# Altium PCB radio-module.PcbDoc
Units mm, origin at the board's own origin, x right, y up, seen from the top; angles counter-clockwise.
Board outline 50.67 x 34.29 mm, 2 copper layers (Top Layer, Bottom Layer); 44 components, 34 nets, 131 pads, 208 vias.
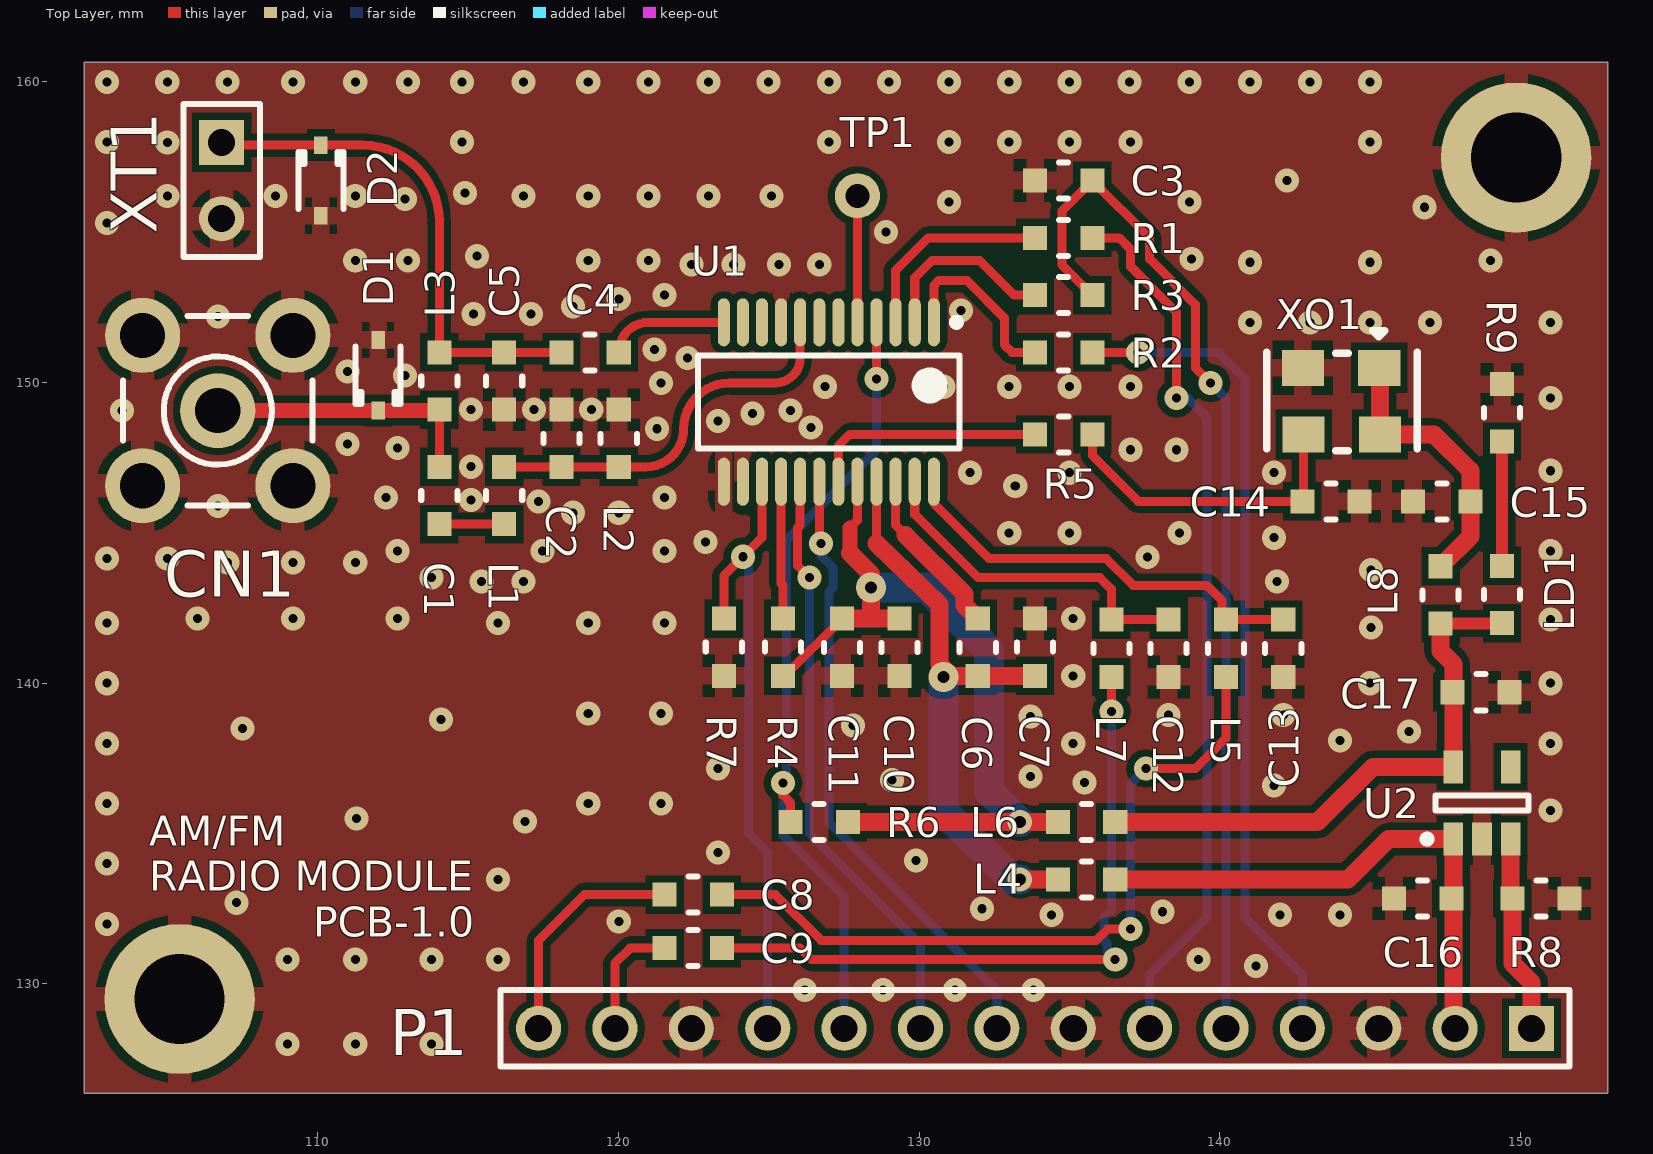
[diagram p0: Top Layer view]
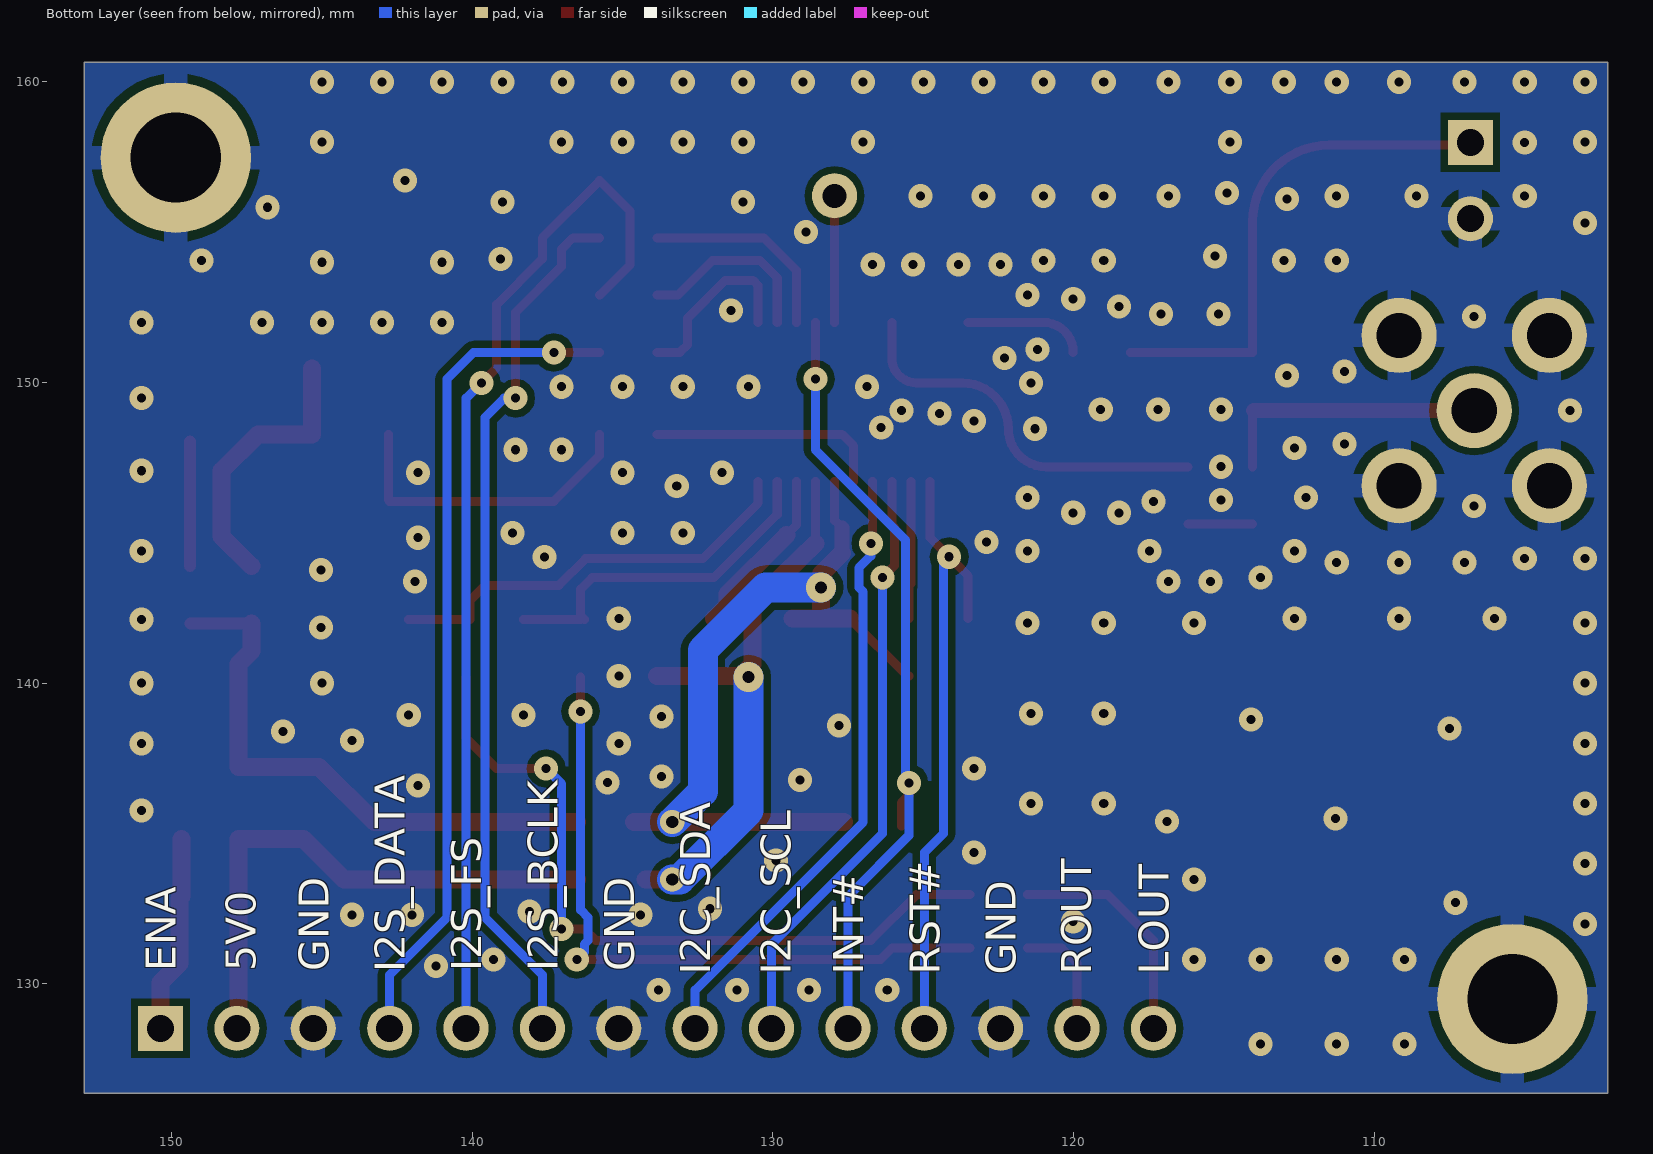
[diagram p1: Bottom Layer view, seen from below]
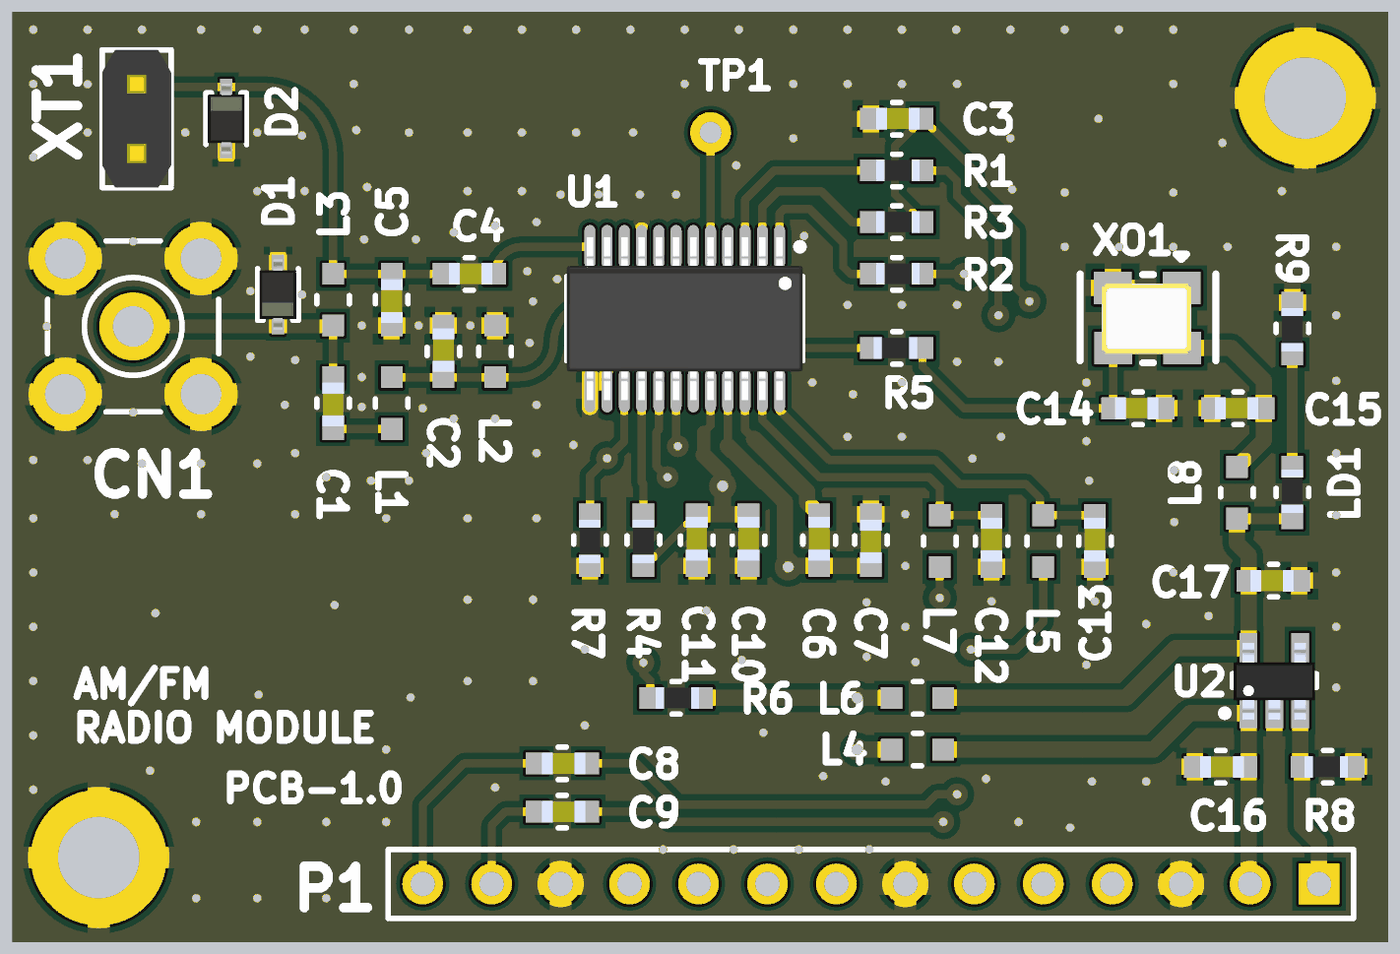
[diagram p2: 3D render of the assembled board from above, using the file's embedded part models]

## Layer stack, top to bottom
Top Solder: solder mask 0.0102, Solder Resist, Dk 3.5
Top Layer: signal copper 0.0356
Dielectric 1: dielectric 0.32, FR-4, Dk 4.8
Bottom Layer: signal copper 0.0356
Bottom Solder: solder mask 0.0102, Solder Resist, Dk 3.5

## Board outline
102.235,126.365 152.908,126.365 152.908,160.655 102.235,160.655

## Design rules (kind name [scope] priority, off if disabled: settings)
Clearance [All] p1: gap=0.23 ignorepadtopadclearanceinfootprint=FALSE
PolygonConnect [All] p1: thpad.connectstyle=Relief thpad.reliefconductorwidth=0.8 thpad.reliefentries=4 thpad.polygonreliefangle="90 Angle" thpad.airgapwidth=0.3 smdpad.connectstyle=Relief smdpad.reliefconductorwidth=0.6 smdpad.reliefentries=4 smdpad.polygonreliefangle="90 Angle" smdpad.airgapwidth=0.3 via.connectstyle=Direct via.reliefconductorwidth=0.254 via.reliefentries=4 via.polygonreliefangle="90 Angle" via.airgapwidth=0.254
RoomDefinition radio-module [InComponentClass('radio-module')] p1 off: confinementstyle=ConfineIn formatcopy=TRUE lockcomponents=FALSE outline 154.051,126.492 168.275,126.492 168.275,131.445 154.051,131.445
RoutingVias [All] p1: holewidth=0.3 width=0.8 viastyle="Through Hole" minholewidth=0.3 minwidth=0.8 maxholewidth=0.4 maxwidth=1
SolderMaskExpansion [All] p1: expansion=0.102
Width [All] p1: maxlimit=1 minlimit=0.3 preferedwidth=0.3
30 further rules are at their usual default settings.

## Components (designator, comment, footprint, x,y, rotation, side; value= is the part's Value field where it differs from the comment)
C1 "06035A330JAT2A" C0603 114.046,147.193 r270 top value=33pF
C2 "GCM1885C2A2R7BA16D" C0603 118.11,147.193 r90 top value=2.7pF
C3 "8.2pF" C0603 133.858,156.718 r0 top
C4 "0.47uF" C0603 118.11,151.003 r0 top
C5 "GCM1885C2A2R7BA16D" C0603 116.205,151.003 r270 top value=2.7pF
C6 "0.22uF" C0603 131.953,140.243 r90 top
C7 "1uF" C0603 133.858,142.148 r270 top
C8 "0.1uF" C0603 121.539,132.969 r0 top value=DNI
C9 "0.1uF" C0603 121.539,131.191 r0 top value=DNI
C10 "0.1uF" C0603 129.35,140.243 r90 top
C11 "1uF" C0603 127.444,140.243 r90 top
C12 "8.2pF" C0603 138.303,140.208 r90 top value=DNI
C13 "8.2pF" C0603 142.113,140.208 r90 top value=DNI
C14 "30pF" C0603 144.653,146.05 r180 top
C15 "CC0603KRX7R9BB104" C0603 148.336,146.05 r180 top value=0.1uF
C16 "10uF" C0603 145.796,132.842 r0 top
C17 "10uF" C0603 149.641,139.7 r180 top
CN1 "SMB" SMB_V-RJ45 106.68,149.066 r0 top locked
D1 "CDSOD323-T05LC" SOD-323 112.014,150.241 r270 top value=TVS
D2 "CDSOD323-T05LC" SOD-323 110.109,156.718 r90 top value=TVS
L1 "LQW18AN18NJ0ZD" IND0603 116.205,147.193 r270 top value=18nH
L2 "LQW18ANR12J00D" IND0603 120.015,147.193 r90 top value=120nH
L3 "CIL 10J 4R7" IND0603 114.046,149.098 r90 top value=4.7uH
L4 "BLM18AG102SN1D" IND0603 136.525,133.477 r180 top value=FB
L5 "BLM18AG102SN1D" IND0603 140.208,140.208 r90 top value=DNI
L6 "BLM18AG102SN1D" IND0603 136.525,135.382 r180 top value=FB
L7 "BLM18AG102SN1D" IND0603 136.398,140.208 r90 top value=DNI
L8 "BLM18AG102SN1D" IND0603 147.347,143.891 r270 top value=EMIF
LD1 "LED_G" R0603 149.388,142 r90 top
P1 "HDR 14" PLS-14 150.368,128.524 r180 top locked
R1 "2k" R0603 133.858,154.813 r0 top
R2 "600" R0603 133.858,151.003 r0 top
R3 "2k" R0603 133.858,152.908 r0 top
R4 "10k" R0603 125.476,142.148 r270 top
R5 "22" R0603 135.763,148.273 r180 top
R6 "10k" R0603 125.73,135.382 r0 top
R7 "100k" R0603 123.507,142.148 r270 top
R8 "100k" R0603 151.638,132.842 r180 top
R9 "680" R0603 149.388,149.945 r270 top
TP1 "TEST-POINT" PAD 127.953,156.21 r0 top
U1 "Si473x-GU" SSOP-24 127,149.352 r270 top locked
U2 "TLV75733PDBVR" SOT-23-5 148.722,136.017 r90 top locked
XO1 "CXO-7C 32.768" CXO-5032 144.018,149.352 r180 top value=CXO-7C
XT1 "AM LOOP" PLS-2 106.807,157.988 r270 top

## Footprints (in the part's own frame and the unit in brackets; to place one, negate y for a bottom-side part, rotate by r counter-clockwise, add the part's x,y. Pads: shape width x height; smd on the part's side, far side on the other; paste and mask are expansions set on the pad)
C0603 [mm]
  rect 0.8x0.8 smd: 1(1.905,0) 2(0,0)
  silkscreen extent 0.8,-0.6 1.1,0.6, body extent 0.2,-0.4 1.8,0.4, height 0.9
CXO-5032 [mm] "TXC 7C SMD CMOS CXO Oscillators"
  rect 1.4x1.2 smd: 1(-1.288,-1.134) 2(1.252,-1.134) 3(1.227,1.079) 4(-1.313,1.079)
  silkscreen extent -2.55,-2.37 2.45,1.63, body extent -1.65,-1.3 1.65,1.3, height 0.8
IND0603 [mm]
  rect 0.8x0.8 smd: 1(1.905,0) 2(0,0)
  silkscreen extent 0.8,-0.6 1.1,0.6
PAD [mm]
  round 1.5 hole 0.8: 1(0,0)
PLS-2 [mm] "Connector; Header; 2 Position"
  rect 1.5x1.5 hole 0.9: 1(0,0)
  round 1.5 hole 0.9: 2(2.54,0)
  silkscreen extent -1.27,-1.27 3.81,1.27, body extent -1.27,-1.27 3.81,1.27, height 8.44
PLS-14 [mm] "Connector; Header; 14 Position"
  rect 1.5x1.5 hole 0.9: 1(0,0)
  round 1.5 hole 0.9: 2(2.54,0) 3(5.08,0) 4(7.62,0) 5(10.16,0) 6(12.7,0) 7(15.24,0) 8(17.78,0) 9(20.32,0) 10(22.86,0) 11(25.4,0) 12(27.94,0) 13(30.48,0) 14(33.02,0)
  silkscreen extent -1.27,-1.27 34.29,1.27
R0603 [mm]
  rect 0.8x0.8 smd: 1(1.905,0) 2(0,0)
  silkscreen extent 0.8,-0.6 1.1,0.6, body extent 0.2,-0.4 1.8,0.4, height 0.5
SMB_V-RJ45 [mm] "Connector; SMB Straight"
  round 2.5 hole 1.5: 1(0,0) 2(-2.5,-2.5) 2(-2.5,2.5) 2(2.5,-2.5) 2(2.5,2.5)
  silkscreen extent -3.15,-3.15 3.15,3.15
SOD-323 [mm]
  rect 0.59x0.45 smd: 1(-1.175,0) 2(1.175,0)
  silkscreen extent -0.95,-0.75 0.95,0.75, body extent -1.3,-0.68 1.3,0.67, height 1.1
SOT-23-5 [mm] "SOT23, 5-Leads, Body 2.9x1.6mm, Pitch 0.95mm, Lead Span 2.8mm, IPC Medium Density"
  rect 1.1x0.65 smd: 1(-1.2,0.95) 2(-1.2,0) 3(-1.2,-0.95) 4(1.2,-0.95) 5(1.2,0.95)
  silkscreen extent -1.32,-1.55 0.25,1.95, body extent -1.44,-1.5 1.4,1.5, height 1.1
SSOP-24 [mm] "SSOP, 24-Leads, Body 8,65x3,90mm, Pitch 0,64mm, IPC Medium Density"
  oval 1.6x0.4 smd: 1(-2.65,3.492) 2(-2.65,2.858) 3(-2.65,2.222) 4(-2.65,1.587) 5(-2.65,0.952) 6(-2.65,0.317) 7(-2.65,-0.318) 8(-2.65,-0.953) 9(-2.65,-1.588) 10(-2.65,-2.223) 11(-2.65,-2.858) 12(-2.65,-3.493) 13(2.65,-3.492) 14(2.65,-2.858) 15(2.65,-2.222) 16(2.65,-1.587) 17(2.65,-0.952) 18(2.65,-0.317) 19(2.65,0.318) 20(2.65,0.953) 21(2.65,1.588) 22(2.65,2.223) 23(2.65,2.858) 24(2.65,3.493)
  silkscreen extent -2.77,-4.35 1.55,4.37, body extent -3,-4.35 3,4.35, height 1.75

## Part data
C1 C2 C3 C4 C5 C6 C7 C8 C9 C10 C11 C12 C13 C14 C15 C16 C17: library part CAP_NPOL, "CAP_NPOL"
CN1: "SMB Straight Connector", LatestRevisionDate=17-Jul-2002, LatestRevisionNote="Re-released for DXP Platform.", Publisher="Altium Limited"
D1 D2: library part TVS_BIDIR, "TVS Diodes"
L1 L2 L3 L8: library part IND_WO_IRON, "IND_WO_IRON"
L4 L5 L6 L7: library part IND_W_IRON, "IND_W_IRON"
LD1: library part LED_GREEN, "LED Green"
P1: "Header, 14-Pin", LatestRevisionDate=17-Jul-2002, LatestRevisionNote="Re-released for DXP Platform.", Publisher="Altium Limited"
R1 R2 R3 R4 R5 R6 R7 R8 R9: library part RESISTOR, "RES"
TP1: "PCB terminal block"
U1: "BROADCAST AM/FM/SW/LW RADIO RECEIVER"
U2: library part TLV733P, "Capacitor-Free, 1A, Low-Dropout Regulator with Foldback Current Limit for Portable Devices"
XO1: library part CXO-7C
XT1: library part "HDR 2", "Header, 2-Pin", LatestRevisionDate=17-Jul-2002, LatestRevisionNote="Re-released for DXP Platform.", Publisher="Altium Limited"

## Free pads (board coordinates)
  round 5 hole 3: MH(105.41,129.498) MH(149.86,157.48)

## Via types
v1: diameter 0.8, hole 0.3, Top Layer to Bottom Layer, tented both sides, 204 vias
v2: diameter 0.8, hole 0.4, Top Layer to Bottom Layer, tented both sides, 2 vias
v3: diameter 1, hole 0.4, Top Layer to Bottom Layer, tented both sides, 2 vias

## Nets (pads, with @x,y where several pads share a name; then routed paths per layer and width w, separated by ;. In a path a pad name is that pad's centre, name@x,y a point inside that pad or via, vN(x,y) a via of type N, cw(c..) or ccw(c..) an arc to the next point about the centre after c; other vN are vias at no path point)
3V3: C17.1 L6.2 L8.1 LD1.2 U2.5 | length 19
  Top Layer w0.3: LD1.2@149.374,141.986 LD1.2
  Top Layer w0.4: L8.1 LD1.2@149.374,141.986
  Top Layer w0.6: L6.2 143.256,135.382 145.091,137.217 U2.5 147.772,140.645 147.347,141.07 L8.1
5V0: C16.1 L4.2 P1.2 U2.1 | length 18.1
  Top Layer w0.6: L4.2 144.272,133.477 145.612,134.817 U2.1 147.772,128.58 P1.2
AVDD: C6.2 C7.1 L4.1 U1.21 | length 19.1
  Top Layer w0.3: 128.588,144.653 U1.21
  Top Layer w0.6: 128.588,144.653 130.683,142.621 130.683,140.624 131.064,140.243 C6.2 C7.1 ; v2(133.35,133.477) L4.1@134.239,133.477
  Bottom Layer w1: v3(130.81,140.208) 130.81,135.763 133.096,133.477 v2(133.35,133.477)
DBYP: C6.1 U1.22 | length 5.7
  Top Layer w0.3: U1.22 129.222,145.255 129.555,144.922
  Top Layer w0.6: 129.555,144.922 131.513,142.965 131.513,142.588 C6.1
GND: C2.1 C3.2 C5.1 C7.2 C10.2 C11.2 C12.2 C13.2 C14.2 C15.1 C16.2 C17.2 CN1.2 D1.1 D2.1 L2.1 P1.3 P1.7 P1.12 pad.MH R7.1 R8.2 R9.2 U1.9 U1.13 U1.14 U2.2 XO1.2 XT1.2
  other v1: 109,128 111.252,128 113.792,128 126.2,129.794 128.8,129.794 131.2,129.794 133.8,129.8 141.2,130.6 109,130.81 111.252,130.81 113.792,130.81 116,130.81 139.3,130.81 103,132 120.015,132.08 134.4,132.3 142,132.3 144,132.3 138.1,132.4 132.1,132.5 107.3,132.7 116,133.477 103,134 129.9,134.1 123.317,134.366 116.9,135.4 111.3,135.5 151,135.763 103,136 119,136 121.412,136 141.8,136.6 135.5,136.7 129.1,136.779 133.7,136.9 123.317,137.16 103,138 135.128,138 151,138 144,138.1 146.3,138.4 107.5,138.5 127.8,138.6 114.1,138.8 133.7,138.9 138.303,138.938 142.113,138.938 119,139 121.412,139 103,140 145,140 151,140 135.128,140.243 145.034,141.859 103,142 116,142 119,142 121.539,142 151,142.113 106,142.148 109.18,142.148 112.649,142.148 135.128,142.148 115.443,143.383 116.84,143.383 141.9,143.383 113.792,143.51 145.034,143.764 107,144.013 109.18,144.013 111.252,144.013 103,144.145 105,144.145 137.6,144.2 112.649,144.399 117.475,144.399 121.539,144.399 151,144.399 122.9,144.7 141.8,144.839 133,145 135,145 138.656,145 118.491,145.669 120.015,145.669 106.68,145.9 117.348,146.05 115.1,146.1 112.268,146.177 121.539,146.177 133.2,146.566 131.7,147 135,147 141.8,147 151.003,147.066 115.1,147.2 137.033,147.764 138.557,147.764 112.649,147.828 110.998,147.955 121.285,148.463 126.4,148.5 123.317,148.717 124.46,148.971 103.5,149.066 125.73,149.066 115.1,149.1 117.2,149.1 119.1,149.1 151,149.479 126.873,149.86 130.81,149.86 133,149.86 135,149.86 137.033,149.86 121.412,149.987 112.903,150.241 110.998,150.368 122.301,150.812 121.2,151.1 141,152 143,152 145,152 147,152 151,152 106.68,152.2 115.189,152.273 117.094,152.273 131.4,152.4 118.491,152.527 120.015,152.781 121.539,152.908 122.428,153.924 123.825,153.924 125.349,153.924 126.682,153.924 141,154 145,154 111.252,154.051 113,154.051 119,154.051 121,154.051 149,154.051 139.065,154.115 115.3,154.2 128.9,155 103,155.3 146.812,155.829 131,156 139,156 112.9,156.1 105,156.21 108.6,156.21 111.252,156.21 116.84,156.21 119,156.21 121,156.21 123,156.21 125.1,156.21 114.9,156.3 142.24,156.718 103,158 105,157.988 114.808,158 127,158 131,158 133,158 135,158 137.033,158 145,158 103,160 105,160 107,160 109.18,160 111.252,160 113,160 114.808,160 116.84,160 119,160 121,160 123,160 125,160 127,160 129,160 131,160 133,160 135,160 137,160 139,160 141,160 143,160 145,160
I2C_SCL: P1.9 U1.17 | length 19.9
  Top Layer w0.3: U1.17 126.047,145.26 125.958,145.17 125.958,143.917 v1(126.365,143.51)
  Bottom Layer w0.3: v1(126.365,143.51) 126.365,135.001 130.048,131.318 P1.9
I2C_SDA: P1.8 U1.18 | length 20.7
  Top Layer w0.3: U1.18 126.682,144.716 v1(126.746,144.653)
  Bottom Layer w0.3: v1(126.746,144.653) 126.746,144.232 127.145,143.833 127.145,143.187 127,143.042 127,135.382 132.588,129.794 P1.8
I2S_BCK: P1.6 R1.1 | length 29.4
  Top Layer w0.3: R1.1 136.652,154.813 137.033,154.432 137.033,153.861 138.557,152.337 v1(138.557,149.479)
  Bottom Layer w0.3: P1.6 137.668,130.302 139.573,132.207 139.573,148.844 138.938,149.479 v1(138.557,149.479)
I2S_DATA: P1.4 R2.1 | length 28.1
  Top Layer w0.3: R2.1 v1(137.287,151.003) v1@137.287,150.749
  Bottom Layer w0.3: v1(137.287,151.003) 139.954,151.003 140.843,150.114 140.843,132.207 142.748,130.302 P1.4
I2S_FS: C3.1 P1.5 R3.1 | length 34.7
  Top Layer w0.3: R3.1 134.747,153.924 134.747,155.702 C3.1 137.668,154.813 137.668,154.115 139.192,152.591 139.192,150.495 v1(139.7,149.987)
  Bottom Layer w0.3: v1(139.7,149.987) 140.208,149.479 P1.5
INT#: P1.10 R6.2 U1.4 | length 27.2
  Top Layer w0.3: v1(125.476,136.678) 125.476,136.302 125.46,136.287 125.73,136.017 R6.2 R6.2@125.73,135.255 ; v1(128.588,150.114) U1.4
  Bottom Layer w0.3: P1.10 127.508,132.905 125.476,134.938 v1(125.476,136.678) 125.476,136.748 125.46,136.763 125.6,136.903 125.6,143.172 125.585,143.187 125.585,144.762 128.588,147.764 v1(128.588,150.114)
LOUT: C8.2 P1.14 | length 7.7
  Top Layer w0.3: P1.14 117.348,131.445 118.872,132.969 C8.2
NetC1_1: C1.1 L1.1 | length 2.2
  Top Layer w0.3: C1.1 L1.1
NetC1_2: C1.2 CN1.1 D1.2 L3.2 | length 9.3
  Top Layer w0.3: L3.2@114.014,149.066 L3.2 C1.2
  Top Layer w0.5: CN1.1 D1.2 L3.2@114.014,149.066
NetC4_2: C4.2 C5.2 D2.2 L3.1 XT1.1 | length 17.1
  Top Layer w0.3: XT1.1 106.902,157.893 D2.2 111.506,157.893 cw(c111.506,155.353) 114.046,155.353 L3.1 C5.2 C4.2
NetC8_1: C8.1 L5.2 | length 25
  Top Layer w0.3: C8.1 125.222,132.969 126.746,131.445 135.89,131.445 136.271,131.826 v1(137.033,131.826) ; v1(137.541,137.16) 139.192,137.16 140.208,138.176 L5.2
  Bottom Layer w0.3: v1(137.033,131.826) 137.033,136.652 v1(137.541,137.16)
NetC9_1: C9.1 L7.2 | length 22.5
  Top Layer w0.3: C9.1 126.047,131.191 126.428,130.81 v1(136.525,130.81) ; v1(136.398,139.065) L7.2
  Bottom Layer w0.3: v1@136.271,131.064 136.271,131.318 136.144,131.445 136.144,132.207 136.398,132.461 v1(136.398,139.065)
NetC12_1: C12.1 L7.1 U1.23 | length 11.6
  Top Layer w0.3: U1.23 129.858,145.618 131.965,143.51 136.017,143.51 136.398,143.129 136.398,142.24 L7.1@136.271,142.113 ; L7.1 C12.1
NetC13_1: C13.1 L5.1 U1.24 | length 14.2
  Top Layer w0.3: U1.24 130.493,145.987 132.334,144.145 136.234,144.145 137.123,143.256 139.573,143.256 140.081,142.748 L5.1@140.081,142.113 ; L5.1 C13.1
NetC14_1: C14.1 R5.2 XO1.3 | length 10.6
  Top Layer w0.3: R5.2 135.763,147.574 137.287,146.05 C14.1 142.791,146.093 XO1.3
NetC15_2: C15.2 L8.2 XO1.1 XO1.4 | length 9.3
  Top Layer w0.3: XO1.1 XO1.1@145.331,150.461
  Top Layer w0.6: XO1.1@145.331,150.461 XO1.4 147.129,148.273 148.336,147.066 C15.2 148.336,144.88 L8.2
NetLD1_1: LD1.1 R9.1 | length 4.1
  Top Layer w0.4: LD1.1 R9.1
NetR1_2: R1.2 U1.3 | length 6.8
  Top Layer w0.3: U1.3 129.222,153.733 130.302,154.813 R1.2
NetR2_2: R2.2 U1.1 | length 6.2
  Top Layer w0.3: U1.1 130.493,153.225 130.661,153.394 131.594,153.394 132.842,152.146 132.842,151.257 133.096,151.003 R2.2
NetR3_2: R3.2 U1.2 | length 6.2
  Top Layer w0.3: U1.2 129.858,153.48 130.429,154.051 132.017,154.051 133.16,152.908 R3.2
NetR4_2: R4.2 U1.16 | length 4.6
  Top Layer w0.3: U1.16 125.412,143.32 125.476,143.256 R4.2
NetR5_1: R5.1 U1.19 | length 7.9
  Top Layer w0.3: U1.19 127.317,147.892 127.699,148.273 R5.1
NetTP1_1: TP1.1 U1.5 | length 4.2
  Top Layer w0.3: U1.5 TP1.1
PWR_EN: P1.1 R8.1 U2.3 | length 6.6
  Top Layer w0.3: R8.1@149.672,132.903 R8.1
  Top Layer w0.6: R8.1@149.672,132.903 U2.3 ; R8.1 149.733,130.683 150.368,130.048 P1.1
RESET#: P1.11 R7.2 U1.15 | length 21.1
  Top Layer w0.3: R7.2 123.507,143.573 v1(124.14,144.206) 124.773,144.839 124.773,146.697 U1.15
  Bottom Layer w0.3: v1(124.14,144.206) 124.333,144.013 124.333,135.001 124.968,134.366 P1.11
ROUT: C9.2 P1.13 | length 4
  Top Layer w0.3: P1.13 119.888,130.683 120.396,131.191 C9.2
VHFI: C2.2 L1.2 L2.2 U1.8 | length 13.1
  Top Layer w0.3: L1.2 C2.2 L2.2 120.904,147.193 ccw(c120.904,148.463) 122.174,148.463 cw(c123.698,148.463) 123.698,149.987 125.222,149.987 ccw(c125.222,150.812) 126.047,150.812 U1.8
VIO_3V3: C10.1 C11.1 L6.1 R4.1 R6.1 U1.20 | length 27.5
  Top Layer w0.3: R4.1 125.539,140.243 C11.1 ; 127.699,145.161 127.953,145.414 U1.20
  Top Layer w0.5: 127.699,144.336 127.699,145.161
  Top Layer w0.6: C11.1 128.397,142.148 ; R6.1 v2(133.35,135.382) L6.1 ; 127.699,144.336 128.397,143.638 v3(128.397,143.187) 128.397,142.148 ; C10.1 128.397,142.148
  Bottom Layer w1: v3(128.397,143.187) 130.244,143.187 132.334,141.097 132.334,136.398 v2(133.35,135.382)
WHIP: C4.1 U1.12 | length 4.1
  Top Layer w0.3: C4.1 cw(c121.014,151.003) 121.014,152.002 U1.12
pads on no net: U1.6 U1.7 U1.10 U1.11 U2.4

## Polygon pours and split planes (outlines as drawn)
GND on Top Layer "NONET_L-01_P-001" (solid, remove dead copper, pour order 4): 102.235,160.655 102.235,126.365 152.908,126.365 152.908,160.655
GND on Bottom Layer "NONET_L-01_P-001" (solid, remove dead copper, pour order 6): 102.235,160.655 152.908,160.655 152.908,126.365 102.235,126.365

## Silkscreen, mask and mechanical layers (free items; w line width, h text height)
Top Overlay:
  text "AM/FM / RADIO MODULE" at 104.394,133.096 h1
  text "PCB-1.0" at 109.855,131.572 h1
Bottom Overlay:
  text "GND" at 134.62,130.429 h1 r270
  text "I2S_BCLK" at 137.16,130.429 h1 r270
  text "I2S_FS" at 139.7,130.429 h1 r270
  text "GND" at 144.78,130.429 h1 r270
  text "5V0" at 147.193,130.429 h1 r270
  text "ENA" at 149.86,130.429 h1 r270
  text "I2S_DATA" at 142.24,130.394 h1 r270
  text "LOUT" at 116.84,130.302 h1 r270
  text "ROUT" at 119.423,130.302 h1 r270
  text "GND" at 121.92,130.302 h1 r270
  text "RST#" at 124.46,130.302 h1 r270
  text "INT#" at 127,130.302 h1 r270
  text "I2C_SCL" at 129.413,130.302 h1 r270
  text "I2C_SDA" at 132.094,130.302 h1 r270
Mechanical 1:
  lines w0.254: 102.108,160.782 153.035,160.782 153.035,126.238 102.108,126.238 102.108,160.782 ; 102.108,160.782 102.108,160.782 ; 102.108,160.782 102.108,160.782